# Altium PCB PCB1.PcbDoc
Units mm, origin at the board's own origin, x right, y up, seen from the top; angles counter-clockwise.
Board outline 47 x 51.49 mm, 2 copper layers (Top Layer, Bottom Layer); 24 components, 23 nets, 117 pads, 7 vias.
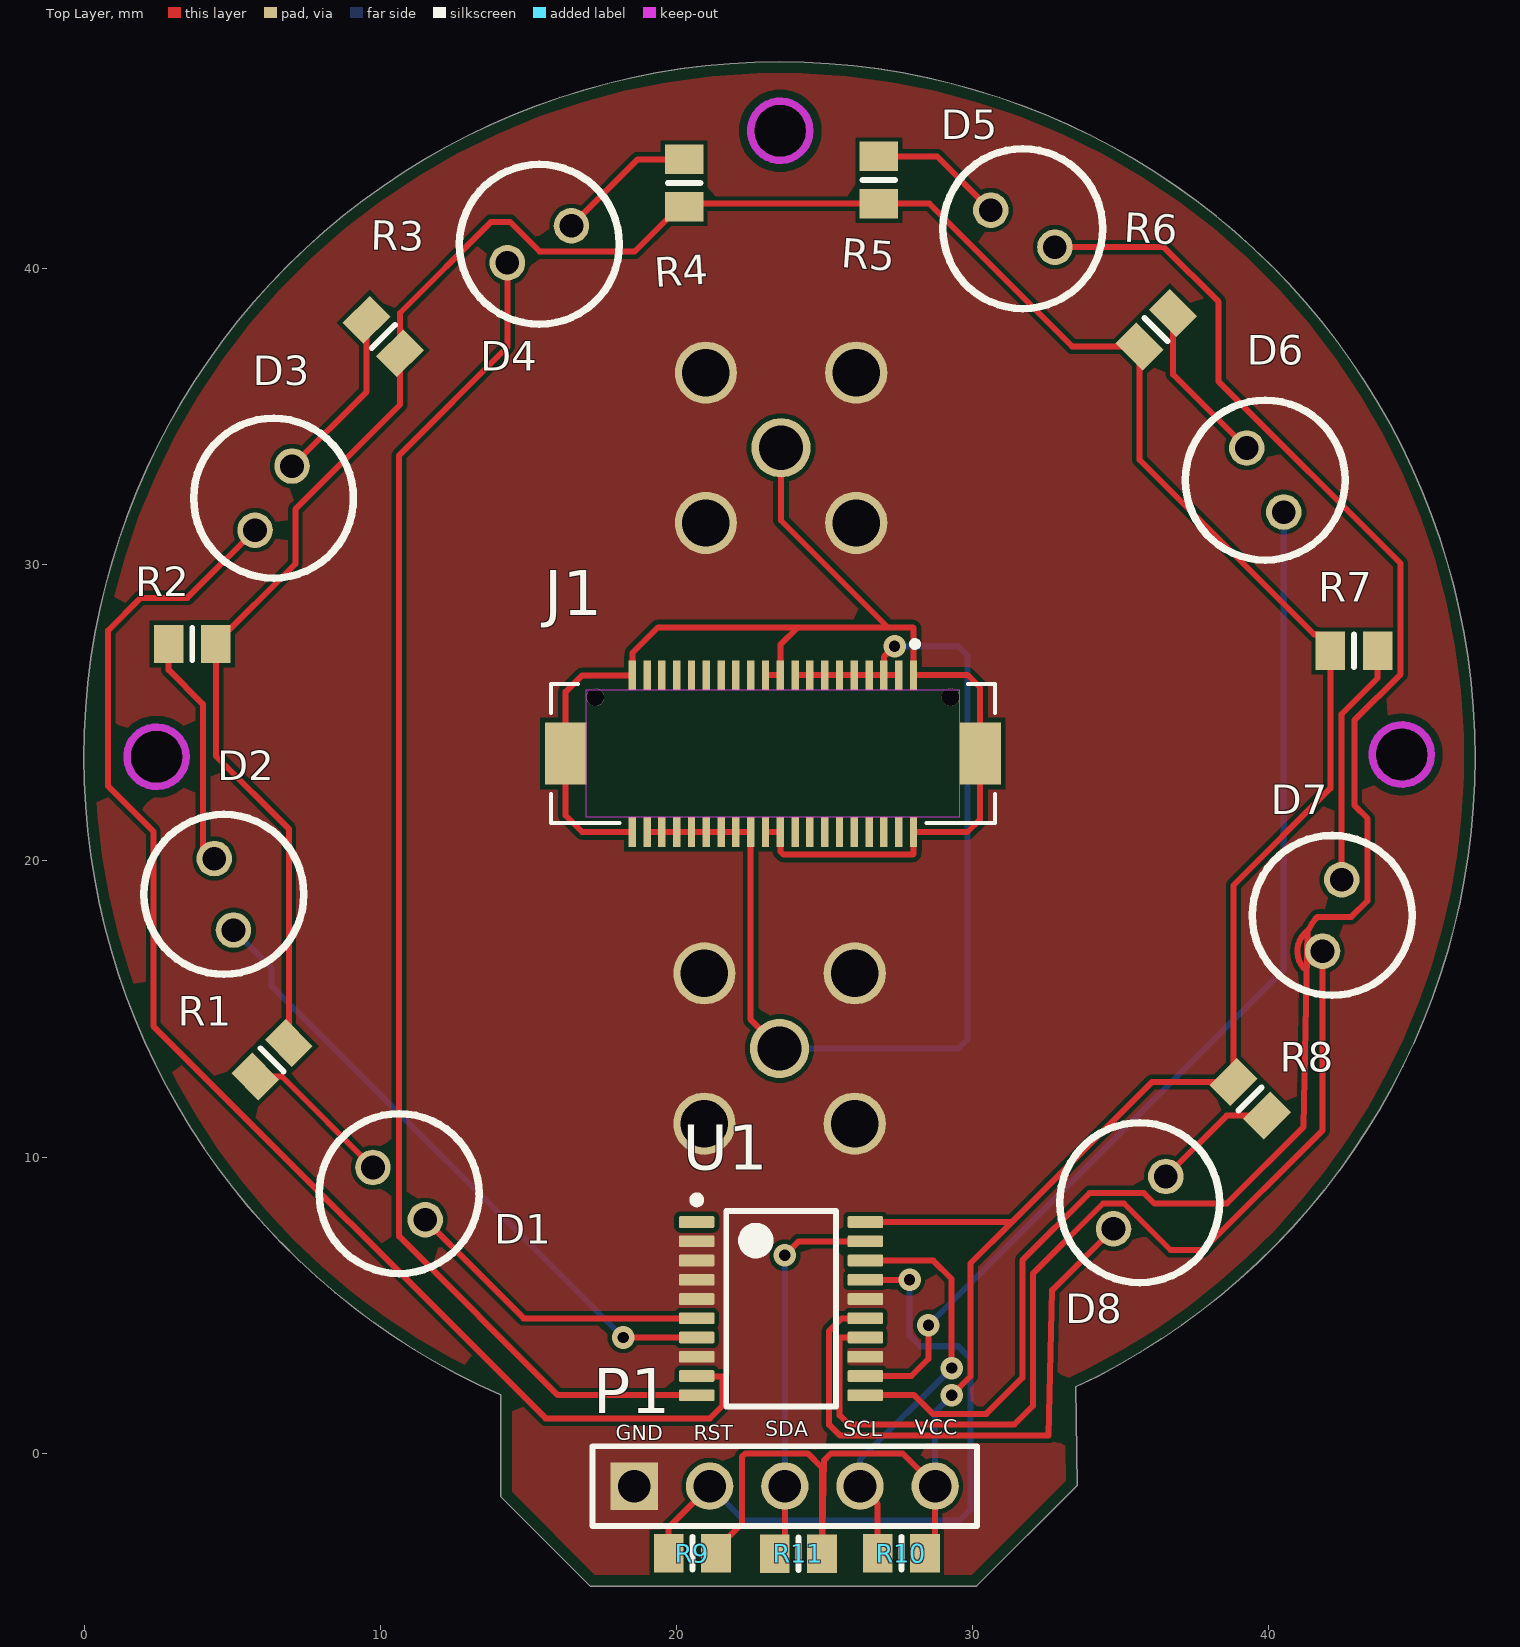
[diagram p0: Top Layer view]
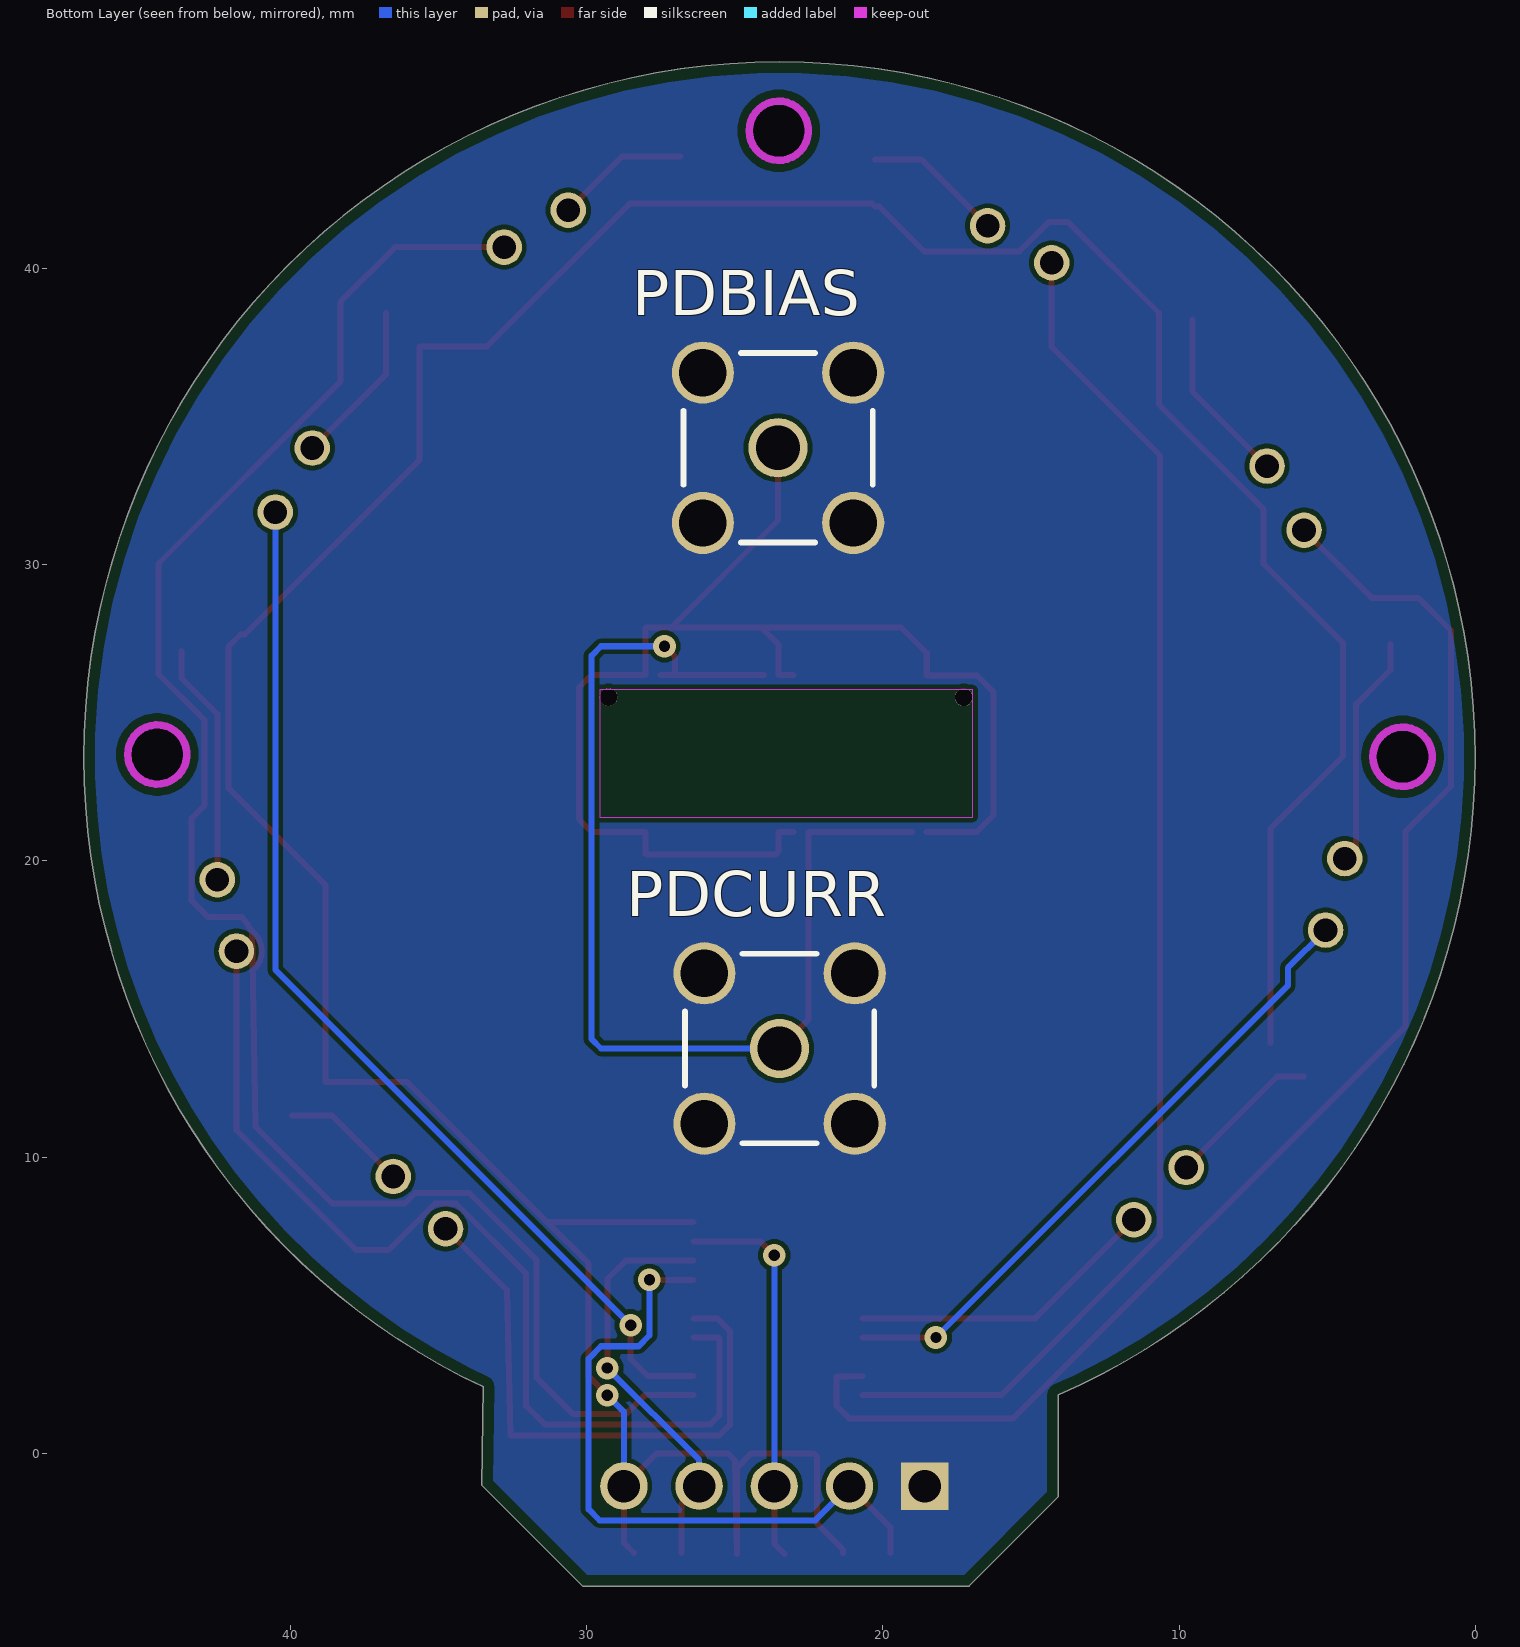
[diagram p1: Bottom Layer view, seen from below]

## Layer stack, top to bottom
Top Solder: solder mask 0.0102, Solder Resist, Dk 3.5
Top Layer: signal copper 0.0356
Dielectric 1: dielectric 0.32, FR-4, Dk 4.8
Bottom Layer: signal copper 0.0356
Bottom Solder: solder mask 0.0102, Solder Resist, Dk 3.5

## Board outline
14.072,1.967 14.072,-1.473 17.094,-4.496 30.15,-4.496 33.55,-1.096 33.502,2.232 ccw(c23.495,23.495) 46.995,23.495 ccw(c23.495,23.495) 23.495,46.995 ccw(c23.495,23.495) -0.005,23.495 ccw(c23.495,23.495)
cut-out: 23.52,43.669 cw(c23.52,44.669) 22.52,44.669 cw(c23.52,44.669) 23.52,45.669 cw(c23.52,44.669) 24.52,44.669 cw(c23.52,44.669)
cut-out: 43.517,23.597 ccw(c44.517,23.597) 44.517,22.597 ccw(c44.517,23.597) 45.517,23.597 ccw(c44.517,23.597) 44.517,24.597 ccw(c44.517,23.597)
cut-out: 2.448,22.52 cw(c2.448,23.52) 1.448,23.52 cw(c2.448,23.52) 2.448,24.52 cw(c2.448,23.52) 3.448,23.52 cw(c2.448,23.52)

## Design rules (kind name [scope] priority, off if disabled: settings)
BoardOutlineClearance [All] p1: gap=0.381 ignorepadtopadclearanceinfootprint=FALSE
Clearance [All] p1: gap=0.152 ignorepadtopadclearanceinfootprint=FALSE except(0: Arc-Hole Track-Hole SMDPad-Hole THPad-Hole Via-Hole Fill-Hole Poly-Hole Region-Hole Text-Hole)
ComponentClearance [All] p1: gap=0.025 collisioncheckmode=3 verticalgap=0.025 showdistances=FALSE
DiffPairsRouting [All] p1: maxlimit=10 minlimit=0.152 mostfreqgap=0.203 toplayer_minwidth=0.152 toplayer_maxwidth=0.381 toplayer_prefwidth=0.203 bottomlayer_minwidth=0.152 bottomlayer_maxwidth=0.381 bottomlayer_prefwidth=0.203 maxuncoupledlength=12.7
HoleSize [All] p1: absolutevalues=TRUE maxlimit=6.731 minlimit=0.33 maxpercent=80.000 minpercent=20.000
HoleToHoleClearance [All] p1: gap=0.254 allowstackedmicrovias=FALSE
MinimumAnnularRing [All] p1: minimumring=0.178
MinimumSolderMaskSliver [All] p1: minsoldermaskwidth=0
PlaneClearance [All] p1: clearance=0.254
PlaneConnect PlaneConnect_1 [All] p1: planeconnectstyle=Direct reliefexpansion=0.508 reliefentries=4 reliefconductorwidth=0.254 reliefairgap=0.254
PlaneConnect [InNet('GND')] p2: planeconnectstyle=Direct reliefexpansion=0.406 reliefentries=4 reliefconductorwidth=0.152 reliefairgap=0.152
PolygonConnect [All] p1: connectstyle=Direct reliefconductorwidth=0.203 reliefentries=4 polygonreliefangle="90 Angle" airgapwidth=0.152
RoutingCorners [All] p1: cornerstyle=45-Degree minsetback=1.25 maxsetback=1.25
RoutingVias [All] p1: holewidth=0.381 width=0.762 viastyle="Through Hole" minholewidth=0.33 minwidth=0.686 maxholewidth=2.54 maxwidth=2.896
SilkToSilkClearance [All] p1: silktosilkclearance=0
SilkToSolderMaskClearance [IsPad] p1: minsilkscreentomaskgap=0.152 clearancetoexposedcopper=TRUE
SolderMaskExpansion [All] p1: expansion=0.075 istentingtop=FALSE
Width [All] p1: maxlimit=10.16 minlimit=0.152 preferedwidth=0.203
20 further rules are at their usual default settings.

## Components (designator, comment, footprint, x,y, rotation, side; value= is the part's Value field where it differs from the comment)
D1 "LED0" TO-18 10.643,8.763 r315 top
D2 "LED0" TO-18 4.724,18.872 r285 top
D3 "LED0" TO-18 6.401,32.258 r240 top
D4 "LED0" TO-18 15.383,40.833 r210 top
D5 "LED0" TO-18 31.715,41.361 r330 top
D6 "LED0" TO-18 39.903,32.868 r300 top
D7 "LED0" TO-18 42.164,18.161 r255 top
D8 "LED0" TO-18 35.662,8.458 r225 top
J1 "DF17(3.0)-40DS-0.5V(57)" HRS_DF17(3.0)-40DS-0.5V(57) 23.272,23.63 r180 top
P1 "61300511121" 61300511121 23.673,-1.118 r0 top
PDBIAS "5-1814832-1" TECO-5-1814832-1_V 23.546,33.96 r180 bottom
PDCURR "5-1814832-1" TECO-5-1814832-1_V 23.495,13.665 r180 bottom
R1 "Res1" 6-0805_L 6.35,13.284 r45 top value=43
R2 "Res1" 6-0805_L 3.655,27.33 r0 top value=43
R3 "Res1" 6-0805_L 10.109,37.719 r315 top value=43
R4 "Res1" 6-0805_L 20.269,42.903 r270 top value=43
R5 "Res1" 6-0805_L 26.848,43.005 r270 top value=43
R6 "Res1" 6-0805_L 36.22,37.948 r225 top value=43
R7 "Res1" 6-0805_L 42.903,27.102 r180 top value=43
R8 "Res1" 6-0805_L 39.395,11.963 r135 top value=43
R9 "Res1" 6-0805_L 20.549,-3.378 r0 top value=10k
R10 "Res1" 6-0805_L 27.61,-3.378 r180 top value=10k
R11 "Res1" 6-0805_L 24.13,-3.404 r180 top value=10k
U1 "TLC59108FIPWR" PW0020A_L 23.546,4.877 r0 top

## Footprints (in the part's own frame and the unit in brackets; to place one, negate y for a bottom-side part, rotate by r counter-clockwise, add the part's x,y. Pads: shape width x height; smd on the part's side, far side on the other; paste and mask are expansions set on the pad)
6-0805_L [mm] "Chip Resistor, Body 2.0x1.2mm, IPC High Density"
  rect 1x1.3 smd: 1(-0.8,0) 2(0.8,0)
  silkscreen extent 0,-0.55 0,0.55, body extent -1.07,-0.7 1.07,0.7, height 0.7
61300511121 [mm] "Pin Header, pitch 2.54 mm, THT, Vertical, single row, 5p"
  rect 1.6x1.6 hole 1.1: 1(-5.08,0)
  round 1.6 hole 1.1: 2(-2.54,0) 3(0,0) 4(2.54,0) 5(5.08,0)
  silkscreen extent -6.5,-1.34 6.5,1.34, body extent -6.35,-1.27 6.35,1.27, height 8.57
HRS_DF17(3.0)-40DS-0.5V(57) [mm]
  rect 0.25x1 smd: 1(-4.75,-2.65) 2(-4.75,2.65) 3(-4.25,-2.65) 4(-4.25,2.65) 5(-3.75,-2.65) 6(-3.75,2.65) 7(-3.25,-2.65) 8(-3.25,2.65) 9(-2.75,-2.65) 10(-2.75,2.65) 11(-2.25,-2.65) 12(-2.25,2.65) 13(-1.75,-2.65) 14(-1.75,2.65) 15(-1.25,-2.65) 16(-1.25,2.65) 17(-0.75,-2.65) 18(-0.75,2.65) 19(-0.25,-2.65) 20(-0.25,2.65) 21(0.25,-2.65) 22(0.25,2.65) 23(0.75,-2.65) 24(0.75,2.65) 25(1.25,-2.65) 26(1.25,2.65) 27(1.75,-2.65) 28(1.75,2.65) 29(2.25,-2.65) 30(2.25,2.65) 31(2.75,-2.65) 32(2.75,2.65) 33(3.25,-2.65) 34(3.25,2.65) 35(3.75,-2.65) 36(3.75,2.65) 37(4.25,-2.65) 38(4.25,2.65) 39(4.75,-2.65) 40(4.75,2.65)
  rect 1.4x2.1 smd: S1(-7,0) S2(7,0)
  round 0.6 hole 0.6 unplated: ""(-6,-1.9) ""(6,-1.9)
  Keep-Out Layer region: 6.3,-2.15 -6.3,-2.15 -6.3,2.15 6.3,2.15
  silkscreen extent -7.5,-3.8 7.5,2.35
PW0020A_L [mm] "SOP, 20-Leads, Body 6.6x4.5mm, Pitch 0.65mm, IPC High Density"
  rrect25% 1.2x0.4 smd: 1(-2.85,2.925) 2(-2.85,2.275) 3(-2.85,1.625) 4(-2.85,0.975) 5(-2.85,0.325) 6(-2.85,-0.325) 7(-2.85,-0.975) 8(-2.85,-1.625) 9(-2.85,-2.275) 10(-2.85,-2.925) 11(2.85,-2.925) 12(2.85,-2.275) 13(2.85,-1.625) 14(2.85,-0.975) 15(2.85,-0.325) 16(2.85,0.325) 17(2.85,0.975) 18(2.85,1.625) 19(2.85,2.275) 20(2.85,2.925)
  silkscreen extent -2.97,-3.3 1.85,3.8, body extent -3.21,-3.25 3.21,3.25, height 1
TECO-5-1814832-1_V [mm] "THD, 5-Leads, Body 6.4x6.4mm, Pitch 5.08mm"
  round 2 hole 1.5: 1(0,0)
  round 2.1 hole 1.6: 2(-2.54,2.54) 3(-2.54,-2.54) 4(2.54,-2.54) 5(2.54,2.54)
  silkscreen extent -3.2,-3.2 3.2,3.2, body extent -3.21,-3.21 3.19,3.19, height 9.5
TO-18 [mm]
  round 1.2 hole 0.8: 1(-1.25,0) 2(1.25,0)
  silkscreen extent -2.7,-2.7 2.7,2.7, body extent -2.94,-2.7 2.7,2.94, height 6.4

## Part data
D1 D2 D3 D4 D5 D6 D7 D8: "Typical INFRARED GaAs LED", LatestRevisionDate=08-Jul-2005, LatestRevisionNote="Mech Layer 1 removed.", PackageDescription="LED; 2 Leads", PackageReference=LED-0, Published=8-Jun-2000, Publisher="Altium Limited"
J1: "Conn Board to Board RCP 40 POS 0.5mm Solder ST SMD Embossed T/R", Package=None, Availability=Unavailable, MP=DF17(3.0)-40DS-0.5V(57), Price=None
P1: library part CMP-1502-01068-1, "THT Vertical Pin Header WR-PHD, Pitch 2.54 mm, Single Row, 5 pins", Contact Resistance=20mOhm, Manufacturer="Wurth Elektronik", Operating Temperature=-40to105degC, Rated Current=3A, Withstanding Voltage=500VAC, Working Voltage=250VAC, Datasheet URL=https://katalog.we-online.de/em/datasheet/6130xx11121.pdf, Gender=Male, Manufacturer URL=http://www.we-online.de, Mounting Technology=THT, Orientation=Vertical, Package Reference=61300511121, Packaging=Bag, Part Number=61300511121, Pin Number=5, Pitch=2.54mm, Publisher=WurthElektronik, Row Number=Single
PDBIAS PDCURR: library part CMP-2000-05415-1, "SMA Connector, Pitch 5.08 mm, 1 Position, Height 9.5 mm, Tail Length 4 mm, -65 to 165 degC, RoHS, Bulk", Frequency Max=3GHz, Manufacturer="TE Connectivity", Package Description="SMA Connector, Pitch 5.08 mm, 1 Position, Height 9.5 mm, Tail Length 4 mm", Coaxial Cable Types=-, Coaxial Termination=Solder, Connector Body Style=StraightJack, Connector Mounting=PCBMount, Connector Type=SMACoaxial, Contact Material=BerylliumCopper, Contact Plating=GoldPlatedContacts, Datasheet URL=http://www.onlinecomponents.com/productFiles/mf-AMP/eng_cd_1814832_a.pdf, Datasheet Version="Rev. B1, 03/2011", Impedance=50ohm, Manufacturer URL=http://www.te.com/, Package Reference=5-1814832-1, Product Range=ZDCSeries, SVHC=NoSVHC(15-Jun-2015)
R1 R2 R3 R4 R5 R6 R7 R8 R9 R10 R11: "Resistor", LatestRevisionDate=17-Jul-2002, LatestRevisionNote="Re-released for DXP Platform.", PackageDescription="Axial Device, Thru-Hole; 2 Leads; 0.3 in Pin Spacing", PackageReference=AXIAL-0.3, Published=8-Jun-2000, Publisher="Altium Limited"
U1: library part CMP-0388-00395-2, "8-Bit Fast-Mode Plus (FM+) I2C Bus LED Driver, 3 to 5.5 V, -40 to 85 degC, 20-pin SOP (PW20), Green (RoHS & no Sb/Br)", Manufacturer="Texas Instruments", Code_JEDEC=MO-153, ComponentLink1Description="Manufacturer URL", ComponentLink1URL=http://www.ti.com/, ComponentLink2Description=Datasheet, ComponentLink2URL=http://www.ti.com/general/docs/lit/getliterature.tsp?genericPartNumber=TLC59108F&fileType=pdf, ComponentLink3Description="Package Specification", ComponentLink3URL=http://www.ti.com.cn/cn/lit/ml/mpds362/mpds362.pdf, DatasheetVersion=SLDS162A, Eco-Plan="Green (RoHS & no Sb/Br)", Iout(Max)(A)=0.12, Mounting Technology="Surface Mount", PackageDescription="20-Pin Plastic Small Outline, Body 6.5 x 4.4 mm, 0.65 mm Pitch", PackageReference=PW0020A, PackageVersion=4040064-5/G, PartNumber=TLC59108FIPWR, SubFamily="LED Driver", Vin(Max)(V)=5.5, Vin(Min)(V)=3

## Via types
v1: diameter 0.762, hole 0.381, Top Layer to Bottom Layer, 7 vias

## Nets (pads, with @x,y where several pads share a name; then routed paths per layer and width w, separated by ;. In a path a pad name is that pad's centre, name@x,y a point inside that pad or via, vN(x,y) a via of type N, cw(c..) or ccw(c..) an arc to the next point about the centre after c; other vN are vias at no path point)
Bias: J1.1 J1.2 J1.19 J1.20 J1.21 J1.22 J1.39 J1.40 J1.S1 J1.S2 PDBIAS.1 | length 47
  Top Layer w0.203: J1.40 16.828,20.98 16.272,21.536 J1.S2 16.272,25.717 16.818,26.264 18.522,26.264 J1.39 18.522,27.026 19.385,27.889 24.106,27.889 ; J1.22 J1.20 23.522,20.32 23.623,20.218 27.996,20.218 28.022,20.244 J1.2 29.845,20.98 30.272,21.407 J1.S1 30.272,25.862 29.845,26.289 J1.1@28.022,26.289 ; J1.21 J1.19 23.522,27.305 24.106,27.889 ; PDBIAS.1 23.546,31.502 27.158,27.889 ; J1.1 J1.1@28.022,26.289 ; 24.106,27.889 27.158,27.889 ; 27.158,27.889 28.005,27.889 28.022,27.873 J1.1@28.022,26.289
CURR: J1.3 J1.5 J1.7 J1.9 J1.11 J1.13 J1.15 J1.17 J1.24 J1.26 J1.28 J1.30 J1.32 J1.34 J1.36 J1.38 PDCURR.1 | length 37.9
  Top Layer w0.203: J1.38 J1.36 J1.34 J1.32 J1.30 J1.28 J1.26 J1.24 22.522,14.638 PDCURR.1 ; J1.17 J1.15 J1.13 J1.11 J1.9 J1.7 J1.5 ; v1(27.381,27.254) 27.022,26.895 J1.5 ; J1.3 J1.5
  Bottom Layer w0.203: PDCURR.1 29.527,13.665 29.845,13.983 29.845,26.937 29.527,27.254 v1(27.381,27.254)
GND: P1.1 PDBIAS.2 PDBIAS.3 PDBIAS.4 PDBIAS.5 PDCURR.2 PDCURR.3 PDCURR.4 PDCURR.5 U1.2 U1.3 U1.4 U1.5 U1.8 U1.13 U1.16
NetD1_1: D1.1 R1.1 | length 5.2
  Top Layer w0.203: R1.1 6.687,12.719 D1.1
NetD1_2: D1.2 U1.6 | length 10.5
  Top Layer w0.203: D1.2 14.854,4.552 U1.6
NetD2_1: D2.1 R2.1 | length 7.9
  Top Layer w0.203: R2.1 2.855,26.457 4.013,25.298 4.013,20.467 D2.1
NetD2_2: D2.2 U1.7 | length 21.7
  Top Layer w0.203: v1(18.212,3.902) U1.7
  Bottom Layer w0.203: D2.2 6.325,16.388 6.325,15.789 v1(18.212,3.902)
NetD3_1: D3.1 R3.1 | length 6
  Top Layer w0.203: D3.1 9.544,35.858 R3.1
NetD3_2: D3.2 U1.9 | length 47.1
  Top Layer w0.203: D3.2 3.493,28.892 1.918,28.892 0.813,27.788 0.813,22.53 2.341,21.002 2.341,14.423 15.596,1.168 21.145,1.168 21.565,1.587 21.565,2.576 U1.9
NetD4_1: D4.1 R4.1 | length 4.7
  Top Layer w0.203: D4.1 18.71,43.703 R4.1
NetD4_2: D4.2 U1.10 | length 46.7
  Top Layer w0.203: D4.2 14.3,37.363 10.643,33.706 10.643,7.316 16.007,1.952 U1.10
NetD5_1: D5.1 R5.1 | length 4.5
  Top Layer w0.203: R5.1 28.814,43.805 D5.1
NetD5_2: D5.2 U1.11 | length 73
  Top Layer w0.203: U1.11 28.046,1.952 28.677,1.321 30.484,1.321 31.699,2.536 31.699,6.511 33.972,8.784 35.805,8.784 36.16,8.428 38.604,8.428 41.199,11.024 ; D5.2 36.48,40.736 38.329,38.887 38.329,36.195 44.475,30.048 44.475,26.314 42.926,24.765 42.926,21.869 43.358,21.438 43.358,18.656 42.815,18.113 41.665,18.113 ; 41.199,11.024 41.324,17.634 ; 41.199,11.024 41.324,17.634 ; 41.199,16.39 cw(c41.84,16.954) 41.324,17.634 ; 41.199,16.39 cw(c41.84,16.954) 41.324,17.634 ; 41.199,16.39 cw(c41.84,16.954) 41.324,17.634 ; 41.199,16.39 cw(c41.84,16.954) 41.324,17.634 ; 41.324,17.634 ccw(c41.2,17.795) 41.382,17.705 cw(c43.028,16.906) 41.597,18.046 41.605,18.054 ; 41.605,18.054 41.665,18.113 ; 41.605,18.054 41.665,18.113
NetD6_1: D6.1 R6.1 | length 5.6
  Top Layer w0.203: R6.1 36.786,36.442 D6.1
NetD6_2: D6.2 U1.12 | length 35.9
  Top Layer w0.203: U1.12 27.951,2.602 28.524,3.175 v1(28.524,4.318)
  Bottom Layer w0.203: v1(28.524,4.318) 40.528,16.322 D6.2
NetD7_1: D7.1 R7.1 | length 8.2
  Top Layer w0.203: D7.1 42.487,24.964 43.703,26.18 R7.1
NetD7_2: D7.2 U1.14 | length 34
  Top Layer w0.203: U1.14 25.552,3.902 25.527,3.876 25.527,1.27 25.832,0.965 31.432,0.965 32.055,1.587 32.055,6.059 34.424,8.428 35.132,8.428 36.702,6.858 37.795,6.858 41.84,10.903 D7.2
NetD8_1: D8.1 R8.1 | length 4.3
  Top Layer w0.203: D8.1 38.601,11.398 R8.1
NetD8_2: D8.2 U1.15 | length 20
  Top Layer w0.203: U1.15 25.596,4.552 25.171,4.127 25.171,0.953 25.54,0.584 32.583,0.584 32.703,5.499 D8.2
NetP1_2: P1.2 R9.1 U1.17 | length 23.1
  Top Layer w0.203: R9.1 19.749,-2.502 P1.2 ; U1.17 v1(27.889,5.852)
  Bottom Layer w0.203: P1.2 22.288,-2.273 29.578,-2.273 29.947,-1.905 29.947,3.188 29.527,3.607 28.258,3.607 27.889,3.975 v1(27.889,5.852)
NetP1_3: P1.3 R11.2 U1.19 | length 13.1
  Top Layer w0.203: R11.2 23.673,-3.061 P1.3 ; v1(23.673,6.68) 24.144,7.152 U1.19
  Bottom Layer w0.203: P1.3 v1(23.673,6.68)
NetP1_4: P1.4 R10.2 U1.18 | length 14
  Top Layer w0.203: P1.4 26.81,-1.715 R10.2 ; U1.18 28.69,6.502 29.312,5.88 v1(29.312,2.87)
  Bottom Layer w0.203: P1.4 26.213,-0.229 v1(29.312,2.87)
VCC: P1.5 R1.2 R2.2 R3.2 R4.2 R5.2 R6.2 R7.2 R8.2 R9.2 R10.1 R11.1 U1.20 | length 130.3
  Top Layer w0.203: R1.2 6.916,21.085 4.455,23.546 R2.2 4.455,27.35 7.137,30.033 7.137,31.877 10.675,35.415 R3.2 10.675,38.513 13.754,41.593 14.389,41.593 15.392,40.589 18.603,40.589 20.117,42.103 R4.2 20.371,42.205 R5.2 28.56,42.205 33.383,37.382 R6.2 35.655,33.55 41.555,27.65 41.705,27.65 42.103,27.252 R7.2 42.103,22.454 38.83,19.18 R8.2 36.071,12.529 31.344,7.802 ; R9.2 21.349,-3.264 22.225,-2.388 22.225,-0.132 22.344,-0.013 24.447,-0.013 24.93,-0.495 R11.1 25,-0.248 25.235,-0.013 27.648,-0.013 P1.5 28.753,-3.035 R10.1 ; U1.20 31.344,7.802 ; v1(29.312,1.956) 29.947,2.591 29.947,6.405 31.344,7.802
  Bottom Layer w0.203: P1.5 28.753,1.397 v1(29.312,1.956)
pads on no net: J1. J1.4 J1.6 J1.8 J1.10 J1.12 J1.14 J1.16 J1.18 J1.23 J1.25 J1.27 J1.29 J1.31 J1.33 J1.35 J1.37 U1.1

## Polygon pours and split planes (outlines as drawn)
GND on Bottom Layer "BOT_GND_PLANE" (solid, pour order 1): 14.072,1.967 14.072,-1.473 17.094,-4.496 30.15,-4.496 33.55,-1.096 33.502,2.232 ccw(c23.495,23.495) 46.995,23.495 ccw(c23.495,23.495) 23.495,46.995 ccw(c23.495,23.495) -0.005,23.495 ccw(c23.495,23.495)
GND on Top Layer "GND_L01_P000" (solid, pour order 0): 14.072,1.967 14.072,-1.473 17.094,-4.496 30.15,-4.496 33.55,-1.096 33.502,2.232 ccw(c23.495,23.495) 46.995,23.495 ccw(c23.495,23.495) 23.495,46.995 ccw(c23.495,23.495) -0.005,23.495 ccw(c23.495,23.495)

## Keep-outs
Keep-Out Layer:
  circle w0.254: c44.517,23.597 r1
  circle w0.254: c23.52,44.669 r1
  circle w0.254: c2.448,23.52 r1

## Silkscreen, mask and mechanical layers (free items; w line width, h text height)
Top Overlay:
  text "VCC" at 28.067,0.61 h0.5
  text "SDA" at 23.012,0.559 h0.5
  text "SCL" at 25.654,0.559 h0.5
  text "GND" at 17.958,0.432 h0.5
  text "RST" at 20.599,0.432 h0.5
Board Outline:
  lines w0.001: -0.005,23.495 ccw(c23.495,23.495) 14.072,1.967 14.072,-1.473 17.094,-4.496 30.15,-4.496 33.55,-1.096 33.502,2.232 ccw(c23.495,23.495) 46.995,23.495 ccw(c23.495,23.495) 23.495,46.995 ccw(c23.495,23.495) -0.005,23.495 ; 1.448,23.52 cw(c2.448,23.52) 2.448,24.52 cw(c2.448,23.52) 3.448,23.52 cw(c2.448,23.52) 2.448,22.52 cw(c2.448,23.52) 1.448,23.52 ; 8.495,23.495 cw(c23.495,23.495) 23.495,38.495 cw(c23.495,23.495) 38.495,23.495 cw(c23.495,23.495) 23.495,8.495 cw(c23.495,23.495) 8.495,23.495 ; 22.52,44.669 cw(c23.52,44.669) 23.52,45.669 cw(c23.52,44.669) 24.52,44.669 cw(c23.52,44.669) 23.52,43.669 cw(c23.52,44.669) 22.52,44.669 ; 43.517,23.597 cw(c44.517,23.597) 44.517,24.597 cw(c44.517,23.597) 45.517,23.597 cw(c44.517,23.597) 44.517,22.597 cw(c44.517,23.597) 43.517,23.597
Mechanical 15:
  lines w0.001: 16.993,-4.42 30.048,-4.42